# Altium PCB PCB1.PcbDoc (part 2 of 2)
Units mm, origin at the board's own origin, x right, y up, seen from the top; angles counter-clockwise.
Board outline 43.94 x 69.98 mm, 2 copper layers (Top Layer, Bottom Layer); 43 components, 85 nets, 278 pads, 109 vias.
Unrouted connection lines stored in the file: 29.
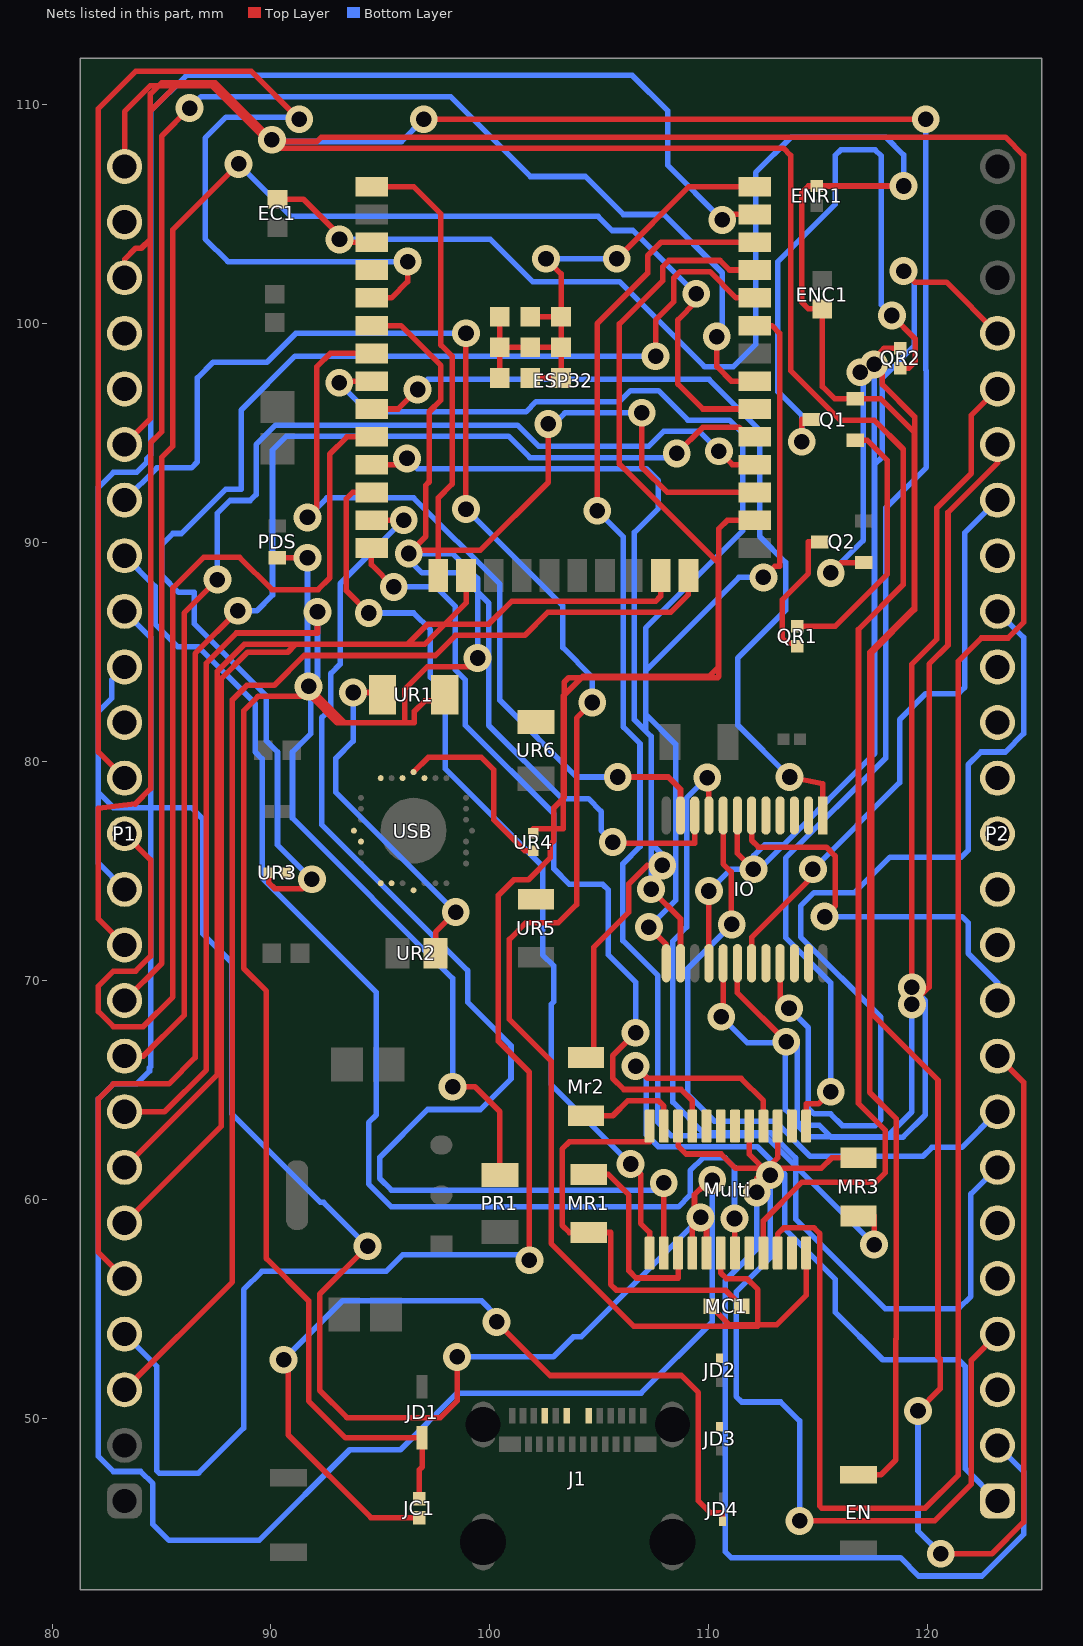
[diagram p2: the nets of this part, all layers, seen from the top]

## Via types
v1: diameter 1.27, hole 0.711, Top Layer to Bottom Layer, 109 vias

## Nets (pads, with @x,y where several pads share a name; then routed paths per layer and width w, separated by ;. In a path a pad name is that pad's centre, name@x,y a point inside that pad or via, vN(x,y) a via of type N, cw(c..) or ccw(c..) an arc to the next point about the centre after c; other vN are vias at no path point) (continued)
NetEC1_2: EC1.2 EN.2 ENC1.1 ENR1.1 ESP32.3 Q1.2 | length 114.1
  Top Layer w0.254: EC1.2@90.297,105.694 91.483,105.694 v1@93.447,103.73 ; v1(93.131,103.861) v1@93.447,103.73 ; ESP32.3@94.601,103.73 v1@93.447,103.73 ; EN.2@116.84,47.42 117.856,47.42 118.542,48.106 118.542,53.619 118.567,53.645 118.567,63.678 117.348,64.897 117.348,84.995 119.393,87.04 119.393,95.037 117.849,96.581 Q1.2@116.701,96.581 115.745,96.581 115.189,97.137 ENC1.1@115.189,100.681 114.554,100.681 114.249,100.986 114.249,105.994 114.554,106.299 ENR1.1@114.935,106.299 v1(118.897,106.299)
  Bottom Layer w0.254: v1(93.131,103.861) 100.025,103.861 101.956,101.93 105.918,101.93 109.804,98.044 111.125,98.044 112.141,99.06 112.141,106.909 113.767,108.534 118.085,108.534 118.897,107.721 v1(118.897,106.299)
NetESP32_1: ESP32.1 ESP32.15 | length 20.7
  Top Layer w0.254: ESP32.1@94.601,106.27 96.52,106.27 97.765,105.025 97.765,99.035 98.273,98.527 98.273,92.685 97.641,92.053 ESP32.15@97.641,88.51
NetESP32_4: ESP32.4 P1.15
NetESP32_5: ESP32.5 P1.14 | length 63.7
  Top Layer w0.254: P1.14@83.312,79.248 82.118,80.442 82.118,109.83 83.832,111.543 89.092,111.543 v1(91.288,109.347) ; ESP32.5@94.601,101.19 95.504,101.19 96.241,101.927 v1(96.241,102.845)
  Bottom Layer w0.254: v1(91.288,109.347) 91.193,109.442 87.949,109.442 86.995,108.488 86.995,103.886 88.036,102.845 v1(96.241,102.845)
NetESP32_6: ESP32.6 IO.10 | length 36.9
  Top Layer w0.254: ESP32.6@94.601,99.92 95.939,99.92 97.765,98.095 97.765,96.52 97.231,95.987 97.231,92.786 97.079,92.634 97.079,90.297 v1(96.291,89.51) ; v1(105.613,76.327) 105.613,76.276 109.358,76.276 IO.10@109.358,77.543
  Bottom Layer w0.254: v1(96.291,89.51) 96.291,89.23 96.901,88.621 98.577,88.621 99.949,87.249 99.949,81.661 103.302,78.308 104.496,78.308 105.08,77.724 105.08,76.86 v1(105.613,76.327)
NetESP32_7: ESP32.7 IO.11 | length 37
  Top Layer w0.254: v1(91.669,91.161) 92.1,91.592 92.1,98.044 92.706,98.65 ESP32.7@94.601,98.65 ; v1(105.842,79.299) 108.149,79.299 108.708,78.74 IO.11@108.708,77.543
  Bottom Layer w0.254: v1(91.669,91.161) 92.558,92.05 96.52,92.05 100.457,88.113 100.457,82.804 103.962,79.299 v1(105.842,79.299)
NetESP32_8: ESP32.8 IO.13 | length 49.2
  Top Layer w0.254: v1(93.116,97.307) 93.189,97.38 ESP32.8@94.601,97.38 ; v1(107.264,72.441) 108.058,71.647 IO.13@108.058,70.793
  Bottom Layer w0.254: v1(93.116,97.307) 94.441,95.983 101.651,95.983 102.112,96.444 105.918,96.444 106.427,96.953 107.696,96.953 109.043,95.606 110.947,95.606 111.557,94.996 111.557,90.551 107.112,86.106 107.112,82.169 108.483,80.797 108.483,73.66 v1(107.264,72.441)
NetESP32_9: ESP32.9 IO.1 | length 40.5
  Top Layer w0.254: ESP32.9@94.601,96.11 95.805,96.11 v1(96.698,97.003) ; v1(113.69,79.299) 115.208,78.994 IO.1@115.208,77.543
  Bottom Layer w0.254: v1(96.698,97.003) 97.156,97.461 110.019,97.461 112.319,95.161 112.319,90.297 113.513,89.103 113.513,86.919 111.323,84.729 111.323,81.666 v1(113.69,79.299)
NetESP32_10: ESP32.10 P1.13 | length 49.6
  Top Layer w0.254: P1.13@83.312,76.708 84.506,75.514 84.506,71.12 83.82,70.434 82.804,70.434 82.118,69.748 82.118,68.58 82.804,67.894 84.166,67.894 85.522,69.25 85.522,87.935 86.919,89.332 88.57,89.332 90.043,87.859 92.151,87.859 92.685,88.392 92.685,94.056 93.468,94.84 ESP32.10@94.601,94.84
NetESP32_11: ESP32.11 IO.14 | length 37
  Top Layer w0.254: ESP32.11@94.601,93.57 95.932,93.57 v1(96.215,93.853) ; v1(107.366,74.168) 108.708,72.826 IO.14@108.708,70.793
  Bottom Layer w0.254: v1(96.215,93.853) 96.684,93.384 107.149,93.384 107.696,92.837 107.696,91.567 106.604,90.475 106.604,81.915 107.366,81.153 v1(107.366,74.168)
NetESP32_12: ESP32.12 Multi.1 | length 42.8
  Top Layer w0.254: v1(94.463,86.792) 93.447,87.808 93.447,92.021 93.726,92.3 ESP32.12@94.601,92.3 ; v1(106.426,61.62) 106.883,61.163 106.883,58.909 107.296,58.496 Multi.1@107.296,57.552
  Bottom Layer w0.254: v1(94.463,86.792) 96.52,86.792 97.283,86.029 97.283,83.862 97.968,83.178 97.968,79.668 102.413,75.223 102.413,71.177 102.921,70.669 102.921,69.037 102.794,68.91 102.794,65.253 v1(106.426,61.62)
NetESP32_13: ESP32.13 Multi.2 | length 57.1
  Top Layer w0.254: ESP32.13@94.601,91.03 96.059,91.03 v1(96.063,91.034) ; Multi.2@107.946,57.552 v1(107.946,60.757)
  Bottom Layer w0.254: v1(96.063,91.034) 93.163,88.134 93.163,84.455 92.735,84.027 92.735,82.423 92.329,82.017 92.329,77.114 98.984,70.46 98.984,69.012 100.965,67.031 100.965,65.507 99.568,64.11 97.155,64.11 94.971,61.925 94.971,60.96 95.504,60.427 107.616,60.427 v1(107.946,60.757)
NetESP32_14: ESP32.14 Multi.21 | length 36.9
  Top Layer w0.254: ESP32.14@94.601,89.76 94.59,89.76 94.59,89.002 v1(95.606,87.986) ; v1(106.655,67.615) 105.613,66.573 105.613,65.532 106.121,65.024 108.738,65.024 109.246,64.516 Multi.21@109.246,63.352
  Bottom Layer w0.254: v1(95.606,87.986) 97.536,87.986 98.425,87.097 98.425,84.194 98.882,83.736 98.882,81.661 102.921,77.622 102.921,75.108 103.632,74.397 105.156,74.397 105.41,74.143 105.41,71.171 106.655,69.926 v1(106.655,67.615)
NetESP32_16: ESP32.16 P1.6 | length 40.6
  Top Layer w0.254: P1.6@83.312,58.928 87.732,63.348 87.732,83.803 88.926,84.998 90.765,84.998 91.126,85.358 97.017,85.358 98.911,87.252 ESP32.16@98.911,88.51
NetESP32_23: ESP32.23 P1.7 | length 47
  Top Layer w0.254: P1.7@83.312,61.468 87.554,65.71 87.554,84.132 88.785,85.363 96.246,85.363 97.16,86.276 99.942,86.276 100.991,87.325 107.569,87.325 107.801,87.557 ESP32.23@107.801,88.51
NetESP32_24: ESP32.24 P1.3 | length 57.3
  Top Layer w0.254: P1.3@83.312,51.308 88.24,56.236 88.24,82.829 88.9,83.49 90.156,83.49 91.516,84.85 97.507,84.85 98.425,85.768 101.593,85.768 102.641,86.817 108.258,86.817 109.071,87.63 ESP32.24@109.071,88.51
NetESP32_26: ESP32.26 P1.4 | length 76.2
  Top Layer w0.254: v1(101.803,57.226) 101.803,65.811 100.381,67.234 100.381,73.889 101.092,74.6 101.752,74.6 102.765,75.612 102.765,76.229 102.916,76.381 102.916,77.893 103.391,78.367 103.391,83.629 103.594,83.833 110.401,83.833 110.465,83.896 110.465,90.649 110.846,91.03 ESP32.26@112.101,91.03
  Bottom Layer w0.254: P1.4@83.312,53.848 84.785,52.375 84.785,47.6 84.887,47.498 86.69,47.498 88.748,49.555 88.748,55.88 89.586,56.718 95.261,56.718 96.012,57.469 101.56,57.469 v1(101.803,57.226)
NetESP32_27: ESP32.27 P1.8 | length 74.1
  Top Layer w0.254: P1.8@83.312,64.008 85.134,64.008 87.046,65.92 87.046,84.506 88.417,85.877 92.126,85.877 v1(92.126,86.843) ; v1(91.719,83.439) 93.385,81.774 96.114,81.774 96.114,83.312 97.144,84.342 99.049,84.342 v1(99.441,84.734) ; v1(96.291,89.51) 96.444,89.662 99.568,89.662 102.667,92.761 v1(102.667,95.428) ; v1(106.934,95.936) 106.934,93.472 108.106,92.3 ESP32.27@112.101,92.3
  Bottom Layer w0.254: v1(91.719,83.439) 92.126,83.845 v1(92.126,86.843) ; v1(96.291,89.51) 98.298,89.51 99.441,88.367 v1(99.441,84.734) ; v1(102.667,95.428) 102.923,95.428 103.431,95.936 v1(106.934,95.936)
NetESP32_28: ESP32.28 P1.9 | length 55.9
  Top Layer w0.254: P1.9@83.312,66.548 84.166,66.548 86.03,68.412 86.03,86.792 v1(87.554,88.316) ; v1(110.465,94.183) 111.078,93.57 ESP32.28@112.101,93.57
  Bottom Layer w0.254: v1(87.554,88.316) 87.554,91.351 88.135,91.932 89.05,91.932 89.32,92.202 89.32,94.488 90.209,95.377 101.262,95.377 102.239,94.4 107.252,94.4 107.95,95.098 109.55,95.098 v1(110.465,94.183)
NetESP32_29: ESP32.29 P1.5 | length 67.1
  Top Layer w0.254: P1.5@83.312,56.388 82.118,57.582 82.118,64.592 82.804,65.278 85.335,65.278 86.538,66.48 86.538,84.941 v1(88.49,86.893) ; v1(108.534,94.082) 109.728,95.275 111.375,95.275 111.811,94.84 ESP32.29@112.101,94.84
  Bottom Layer w0.254: v1(88.49,86.893) 89.357,86.893 90.068,87.605 90.068,94.234 90.703,94.869 100.85,94.869 101.828,93.892 108.344,93.892 v1(108.534,94.082)
NetESP32_30: ESP32.30 P1.10 | length 72.2
  Top Layer w0.254: P1.10@83.312,69.088 85.014,70.79 85.014,93.91 85.509,94.405 85.509,104.295 v1(88.519,107.305) ; v1(109.423,101.371) 109.423,101.016 108.585,100.178 108.585,97.253 109.728,96.11 ESP32.30@112.101,96.11
  Bottom Layer w0.254: v1(88.519,107.305) 90.916,104.909 104.944,104.909 105.588,104.265 106.53,104.265 v1(109.423,101.371)
NetESP32_31: ESP32.31 P1.11 | length 75.5
  Top Layer w0.254: P1.11@83.312,71.628 82.118,72.822 82.118,77.876 83.801,78.067 84.506,78.772 84.506,94.57 85.001,95.066 85.001,108.572 v1(86.284,109.855) ; v1(110.367,99.419) 110.367,98.044 111.031,97.38 ESP32.31@112.101,97.38
  Bottom Layer w0.254: v1(86.284,109.855) 86.808,110.38 98.205,110.38 101.854,106.731 104.36,106.731 106.096,104.995 107.959,104.995 110.617,102.337 110.617,99.67 v1(110.367,99.419)
NetESP32_33: ESP32.33 Mr2.1 | length 40.1
  Top Layer w0.254: Mr2.1@104.394,66.477 104.75,66.477 104.75,71.526 106.35,73.127 106.35,74.422 107.188,75.26 v1(107.874,75.26) ; ESP32.33@112.101,99.92 112.881,99.92 113.233,99.568 113.233,88.925 113.005,88.925 v1(112.497,88.417)
  Bottom Layer w0.254: v1(107.874,75.26) 107.874,75.768 107.366,76.276 107.366,81.153 107.112,81.407 107.112,84.15 111.379,88.417 v1(112.497,88.417)
NetESP32_34: ESP32.34 UR3.2 | length 57.8
  Top Layer w0.254: UR3.2@89.895,74.93 89.895,74.473 90.174,74.193 91.44,74.193 v1(91.872,74.625) ; v1(107.569,98.523) 107.569,100.178 108.407,101.016 108.407,102.108 108.687,102.387 110.055,102.387 111.252,101.19 ESP32.34@112.101,101.19
  Bottom Layer w0.254: v1(91.872,74.625) 90.297,76.2 90.297,80.442 89.789,80.95 89.789,83.007 86.487,86.309 86.487,87.732 85.776,87.732 85.014,88.494 85.014,89.916 85.522,90.424 85.909,90.424 87.924,92.44 88.643,92.44 88.643,96.062 91.104,98.523 v1(107.569,98.523)
NetESP32_35: ESP32.35 UR4.2 | length 40.8
  Top Layer w0.254: UR4.2@101.981,76.729 101.981,76.941 103.353,76.941 103.353,83.007 104.242,83.896 110.007,83.896 110.439,84.328 110.439,89.078 105.918,93.599 105.918,99.996 107.899,101.977 107.899,102.616 108.179,102.895 110.512,102.895 110.947,102.46 ESP32.35@112.101,102.46
NetESP32_36: ESP32.36 MR3.1 | length 61.7
  Top Layer w0.254: v1(104.902,91.465) 104.902,100.006 107.213,102.317 107.213,103.124 107.819,103.73 ESP32.36@112.101,103.73 ; MR3.1@116.84,59.253 117.551,59.253 v1(117.551,57.937)
  Bottom Layer w0.254: v1(104.902,91.465) 106.096,90.272 106.096,81.585 106.858,80.823 106.858,76.119 106.074,75.335 106.074,71.828 107.671,70.231 107.671,63.525 108.28,62.916 112.573,62.916 v1(117.551,57.937)
NetESP32_37: ESP32.37 P1.12 | length 70.2
  Top Layer w0.254: v1(110.617,104.75) 110.867,105 ESP32.37@112.101,105
  Bottom Layer w0.254: P1.12@83.312,74.168 82.118,75.362 82.118,92.532 82.804,93.218 83.864,93.218 84.336,93.69 84.336,93.842 84.506,94.012 84.506,109.728 86.131,111.354 106.502,111.354 108.128,109.728 108.128,107.239 v1(110.617,104.75)
NetESP32_38: ESP32.38 ESP32.39 | length 25
  Top Layer w0.254: ESP32.39@100.451,97.53 ESP32.39@100.451,98.93 ; ESP32.39@100.451,100.33 ESP32.39@100.451,98.93 ; ESP32.39@101.851,97.53 ESP32.39@103.251,97.53 ESP32.39@103.251,98.93 ; ESP32.39@101.851,100.33 ESP32.39@103.251,100.33 ; v1(102.565,102.972) 103.251,102.286 ESP32.39@103.251,100.33 ; v1(105.795,102.972) 109.093,106.27 ESP32.38@112.101,106.27 ; ESP32.39@100.451,98.93 ESP32.39@101.851,98.93 ESP32.39@103.251,98.93 ; ESP32.39@103.251,98.93 ESP32.39@103.251,100.33
  Bottom Layer w0.254: v1(102.565,102.972) v1(105.795,102.972)
NetIO_2: IO.2 P2.14
NetIO_3: IO.3 P2.13
NetIO_4: IO.4 P2.12
NetIO_5: IO.5 P2.11
NetIO_6: IO.6 P2.10 | length 19
  Top Layer w0.254: IO.6@111.958,77.543 111.958,76.408 112.268,76.098 115.367,76.098 115.773,75.692 115.773,73.406 v1(115.291,72.923)
  Bottom Layer w0.254: v1(115.291,72.923) 121.564,72.923 121.844,72.644 121.844,71.247 123.19,69.901 P2.10@123.19,69.088
NetIO_7: IO.7 P2.9 | length 112.8
  Top Layer w0.254: IO.7@111.308,77.543 111.308,75.814 v1(112.039,75.082) ; v1(117.551,98.146) 117.932,97.765 117.932,97.231 119.405,95.758 119.405,86.944 117.45,84.988 117.45,68.478 120.472,65.456 120.472,52.807 120.574,52.705 120.574,51.359 v1(119.558,50.343) ; v1(120.599,43.815) 122.936,43.815 124.384,45.263 124.384,65.354 P2.9@123.19,66.548
  Bottom Layer w0.254: v1(112.039,75.082) 112.039,75.692 112.547,76.2 113.404,76.2 117.551,80.347 v1(117.551,98.146) ; v1(119.558,50.343) 119.558,44.856 v1(120.599,43.815)
NetIO_8: IO.8 P2.8 | length 29.9
  Top Layer w0.254: IO.8@110.658,77.543 110.658,75.329 111.023,74.963 111.023,72.593 v1(111.049,72.568)
  Bottom Layer w0.254: v1(111.049,72.568) 109.042,70.561 109.042,64.795 110.256,63.582 113.017,63.582 114.623,61.976 119.786,61.976 120.193,62.382 121.564,62.382 P2.8@123.19,64.008
NetIO_9: IO.9 P2.7 | length 43
  Top Layer w0.254: v1(109.931,79.273) 110.008,79.197 IO.9@110.008,77.543
  Bottom Layer w0.254: v1(109.931,79.273) 108.991,78.334 108.991,72.441 108.356,71.806 108.356,64.444 109.758,63.043 112.821,63.043 113.97,61.894 113.97,59.106 118.059,55.016 121.412,55.016 121.971,55.575 121.971,60.249 P2.7@123.19,61.468
NetIO_16: IO.16 P2.22 | length 41.9
  Top Layer w0.254: IO.16@110.008,70.793 v1(110.007,74.092) ; v1(118.897,102.413) 119.405,101.905 120.853,101.905 P2.22@123.19,99.568
  Bottom Layer w0.254: v1(110.007,74.092) 110.998,75.082 112.286,75.082 117.577,80.373 117.577,93.574 117.932,93.929 117.932,97.536 119.38,98.984 119.38,101.93 v1(118.897,102.413)
NetIO_17: IO.17 P2.21 | length 51.1
  Top Layer w0.254: v1(110.566,68.351) 110.658,68.443 IO.17@110.658,70.793 ; v1(119.278,69.698) 119.278,84.455 120.421,85.598 120.421,91.6 121.996,93.174 121.996,95.834 P2.21@123.19,97.028
  Bottom Layer w0.254: v1(110.566,68.351) 111.766,67.151 113.153,67.151 113.502,66.802 113.502,64.108 114.225,63.385 115.053,63.385 115.59,62.848 118.872,62.848 119.888,63.864 119.888,69.088 v1(119.278,69.698)
NetIO_18: IO.18 P2.20 | length 46.9
  Top Layer w0.254: IO.18@111.308,70.793 111.308,69.438 v1(113.538,67.208) ; v1(119.278,68.91) 120.066,69.698 120.066,84.455 120.929,85.319 120.929,91.389 123.19,93.65 P2.20@123.19,94.488
  Bottom Layer w0.254: v1(113.538,67.208) 114.046,67.208 114.046,63.373 114.554,62.865 118.135,62.865 119.278,64.008 v1(119.278,68.91)
NetIO_19: IO.19 P2.19 | length 26.7
  Top Layer w0.254: IO.19@111.958,70.793 111.958,71.973 114.757,74.772 v1(114.757,75.082)
  Bottom Layer w0.254: v1(114.757,75.082) 118.72,79.045 118.72,81.915 119.913,83.109 121.412,83.109 121.691,83.388 121.691,90.449 P2.19@123.19,91.948
NetIO_20: IO.20 P2.18
NetIO_21: IO.21 P2.17 | length 44
  Top Layer w0.254: IO.21@113.258,70.793 113.258,69.139 v1(113.665,68.732)
  Bottom Layer w0.254: v1(113.665,68.732) 114.554,67.843 114.554,64.16 114.808,63.906 115.565,63.906 116.098,63.373 117.602,63.373 117.865,63.636 117.865,68.325 114.194,71.995 114.194,73.401 114.808,74.016 116.662,74.016 118.288,75.641 121.539,75.641 121.844,75.946 121.844,79.858 122.428,80.442 123.546,80.442 124.384,81.28 124.384,85.674 P2.17@123.19,86.868
NetIO_22: IO.22 P2.16
NetIO_23: IO.23 P2.15
NetJ1_A4: J1.A4 JC1.1 JD1.2 UR1.1 | length 52.4
  Top Layer w0.254: JC1.1@96.774,46.323 96.774,47.65 96.901,47.777 JD1.2@96.901,49.111 93.408,49.111 91.719,50.8 91.719,55.372 89.789,57.302 89.789,69.52 88.748,70.561 88.748,82.321 89.408,82.982 91.821,82.982 93.029,81.774 96.545,81.774 96.545,82.296 97.028,82.779 97.946,82.779 UR1.1@97.946,83.058
NetJ1_A6: J1.A6 JD2.2 USB.4
NetJ1_A7: J1.A7 JD3.2 USB.5
NetJC1_2: JC1.2 JD4.2 | length 39.7
  Top Layer w0.254: v1(90.576,52.68) 90.78,52.476 90.78,49.251 94.564,45.466 JC1.2@96.774,45.466 ; v1(100.305,54.407) 102.753,51.958 108.747,51.958 109.525,51.181 109.525,46.228 110.058,45.695 110.617,45.695 JD4.2@110.617,45.297
  Bottom Layer w0.254: v1(90.576,52.68) 93.269,55.372 99.619,55.372 100.305,54.686 v1(100.305,54.407)
NetMC1_1: MC1.1 Multi.12 | length 7.2
  Top Layer w0.254: MC1.1@110.109,55.118 110.956,54.271 113.098,54.271 114.446,55.62 Multi.12@114.446,57.552
NetMC1_2: MC1.2 MR1.1 Multi.24 | length 19.5
  Top Layer w0.254: Multi.24@107.296,63.352 107.296,62.636 103.632,62.636 103.302,62.306 103.302,58.821 103.632,58.491 MR1.1@104.521,58.491 105.512,58.491 105.512,56.122 105.779,55.855 110.772,55.855 MC1.2@111.509,55.118
NetMR1_2: MR1.2 Multi.3 | length 9.2
  Top Layer w0.254: MR1.2@104.521,61.143 105.41,61.143 106.35,60.203 106.35,56.744 106.68,56.413 108.596,56.413 Multi.3@108.596,57.552
NetMr2_2: Mr2.2 Multi.23 | length 4.9
  Top Layer w0.254: Mr2.2@104.394,63.825 105.613,63.825 106.304,64.516 107.692,64.516 107.946,64.262 Multi.23@107.946,63.352
NetMR3_2: MR3.2 Multi.22 | length 9.8
  Top Layer w0.254: Multi.22@108.596,63.352 108.596,62.448 108.966,62.078 110.566,62.078 111.227,61.417 115.133,61.417 115.621,61.905 MR3.2@116.84,61.905
NetMulti_4: Multi.4 P1.17 | length 85.8
  Top Layer w0.254: Multi.4@109.246,57.552 109.246,58.979 109.347,59.08 109.347,60.223 109.728,60.604 109.88,60.604 v1(110.16,60.884)
  Bottom Layer w0.254: P1.17@83.312,86.868 84.506,85.674 84.506,66.072 84.452,66.017 84.452,65.866 83.864,65.278 82.804,65.278 82.118,64.592 82.118,48.26 82.804,47.574 84.049,47.574 84.607,47.015 84.607,45.161 85.344,44.425 89.459,44.425 93.599,48.565 95.91,48.565 98.501,51.156 106.909,51.156 110.16,54.407 v1(110.16,60.884)
NetMulti_5: Multi.5 P1.16 | length 66.3
  Top Layer w0.254: v1(94.412,57.861) 92.227,55.677 92.227,51.283 93.472,50.038 97.739,50.038 98.501,50.8 v1(98.501,52.807) ; v1(109.626,59.182) 109.896,58.912 Multi.5@109.896,57.552
  Bottom Layer w0.254: P1.16@83.312,84.328 82.728,83.744 82.728,82.906 82.118,82.296 82.118,78.588 82.804,77.902 86.36,77.902 86.893,77.368 86.893,72.136 88.214,70.815 88.214,63.906 92.253,59.868 92.405,59.868 v1(94.412,57.861) ; v1(98.501,52.807) 102.895,52.807 103.81,53.721 104.165,53.721 v1(109.626,59.182)
NetMulti_6: Multi.6 P1.19 | length 83.8
  Top Layer w0.254: v1(98.908,91.537) v1(98.908,99.568) ; v1(104.673,82.702) 103.962,81.991 103.962,73.473 103.133,72.644 101.651,72.644 100.889,71.882 100.889,68.224 102.794,66.319 102.794,57.988 106.578,54.204 112.243,54.204 112.243,55.88 111.735,56.388 110.8,56.388 110.546,56.642 Multi.6@110.546,57.552
  Bottom Layer w0.254: P1.19@83.312,91.948 84.785,93.421 86.36,93.421 86.639,93.701 86.639,97.536 87.351,98.247 89.812,98.247 91.133,99.568 v1(98.908,99.568) ; v1(98.908,91.537) 103.331,87.114 103.331,85.213 104.673,83.871 v1(104.673,82.702)
NetMulti_7: Multi.7 P1.18 | length 57
  Top Layer w0.254: v1(111.176,59.131) 111.196,59.111 Multi.7@111.196,57.552
  Bottom Layer w0.254: P1.18@83.312,89.408 84.709,88.011 84.709,86.284 85.75,85.242 86.69,85.242 89.281,82.652 89.281,80.442 89.593,80.129 89.593,74.685 94.818,69.46 94.818,63.871 94.463,63.515 94.463,60.706 95.504,59.665 108.61,59.665 109.144,60.198 109.144,61.316 109.728,61.9 110.744,61.9 111.176,61.468 v1(111.176,59.131)
NetMulti_8: Multi.8 P1.21
NetMulti_9: Multi.9 P1.20 | length 105.6
  Top Layer w0.254: P1.20@83.312,94.488 84.493,95.669 84.493,109.728 85.636,110.871 87.3,110.871 90.145,108.026 113.411,108.026 113.741,107.696 113.741,97.866 116.002,95.606 117.551,95.606 118.885,94.272 118.885,88.087 116.84,86.042 116.84,64.389 118.059,63.17 118.059,61.214 117.622,60.777 114.244,60.777 112.496,59.029 Multi.9@112.496,57.552
NetMulti_10: Multi.10 P1.23 | length 135.4
  Top Layer w0.254: P1.23@83.312,102.108 83.312,102.946 83.82,103.454 84.074,103.454 84.493,103.873 84.493,110.503 85.014,111.023 87.452,111.023 90.145,108.331 92.1,108.331 92.304,108.534 123.546,108.534 124.384,107.696 124.384,86.36 123.673,85.649 122.453,85.649 121.387,84.582 121.387,47.396 119.888,45.898 115.164,45.898 115.062,45.999 115.062,58.445 114.808,58.699 113.425,58.699 113.146,58.42 Multi.10@113.146,57.552
NetMulti_11: Multi.11 P1.22
NetMulti_13: Multi.13 P1.25 | length 91.4
  Top Layer w0.254: P1.25@83.312,107.188 83.312,109.703 84.48,110.871 87.579,110.871 v1(90.043,108.407) ; v1(96.977,109.347) v1(119.913,109.347) ; Multi.13@114.446,63.352 114.446,64.364 115.011,64.364 v1(115.57,64.922)
  Bottom Layer w0.254: v1(90.043,108.407) 90.043,108.331 95.961,108.331 v1(96.977,109.347) ; v1(115.57,64.922) 115.57,69.901 113.513,71.958 113.513,75.59 118.085,80.162 118.085,91.592 119.939,93.447 119.939,97.866 119.913,97.892 v1(119.913,109.347)
NetMulti_14: Multi.14 P1.24
NetMulti_15: Multi.15 P2.2 | length 39.9
  Top Layer w0.254: v1(112.192,60.325) 112.192,60.946 113.146,61.9 Multi.15@113.146,63.352
  Bottom Layer w0.254: v1(112.192,60.325) 112.192,57.734 110.744,56.286 110.744,43.917 111.023,43.637 118.751,43.637 119.589,42.799 122.479,42.799 124.384,44.704 124.384,47.574 P2.2@123.19,48.768
NetMulti_16: Multi.16 P2.1 | length 39
  Top Layer w0.254: v1(106.655,66.091) 107.213,65.532 111.48,65.532 112.496,64.516 Multi.16@112.496,63.352
  Bottom Layer w0.254: v1(106.655,66.091) 107.137,65.608 107.137,62.967 107.696,62.408 112.217,62.408 113.462,61.163 113.462,58.674 115.773,56.363 115.773,54.855 117.948,52.68 121.412,52.68 121.717,52.375 121.717,47.701 P2.1@123.19,46.228
NetMulti_17: Multi.17 P2.4 | length 37.2
  Top Layer w0.254: Multi.17@111.846,63.352 111.846,62.068 v1(112.801,61.112) ; v1(114.148,45.314) 120.315,45.314 121.996,46.995 121.996,52.654 P2.4@123.19,53.848
  Bottom Layer w0.254: v1(112.801,61.112) 112.801,57.328 111.252,55.778 111.252,51.003 111.506,50.749 113.284,50.749 114.148,49.886 v1(114.148,45.314)
NetMulti_18: Multi.18 P2.3
NetMulti_19: Multi.19 P2.6
NetMulti_20: Multi.20 P2.5
NetPDS_1: PDS.1 PR1.1 | length 34.6
  Top Layer w0.254: PDS.1@90.297,89.318 v1(91.669,89.318) ; v1(98.298,65.151) 99.314,65.151 100.457,64.008 PR1.1@100.457,61.117
  Bottom Layer w0.254: v1(91.669,89.318) 91.669,83.541 91.592,83.464 91.821,83.236 91.821,81.28 90.983,80.442 90.983,77.419 98.298,70.104 v1(98.298,65.151)
NetQ1_1: Q1.1 QR1.2 | length 12.1
  Top Layer w0.254: QR1.2@114.046,86.177 115.772,86.177 118.161,88.565 118.161,93.767 117.246,94.681 Q1.1@116.701,94.681
NetQ1_3: Q1.3 QR2.1 USB.24 | length 29.2
  Top Layer w0.254: v1(114.249,94.615) 114.249,95.631 Q1.3@114.681,95.631 ; v1(118.364,100.381) 119.431,99.314 119.431,98.278 119.126,97.973 QR2.1@118.745,97.973
  Bottom Layer w0.254: v1(114.249,94.615) 114.249,95.809 113.157,96.901 113.157,102.845 115.773,105.461 115.773,107.696 116.027,107.95 117.602,107.95 117.881,107.671 117.881,100.863 v1(118.364,100.381)
NetQ2_1: Q2.1 QR2.2 | length 13.8
  Top Layer w0.254: v1(115.57,88.621) 116.042,89.093 Q2.1@117.088,89.093 ; v1(116.916,97.79) 118.003,98.877 QR2.2@118.745,98.877
  Bottom Layer w0.254: v1(115.57,88.621) 117.054,90.105 117.054,97.652 v1(116.916,97.79)
NetQ2_3: Q2.3 QR1.1 USB.28 | length 6.2
  Top Layer w0.254: QR1.1@114.046,85.273 113.36,85.598 113.36,87.405 114.554,88.599 114.554,90.043 Q2.3@115.068,90.043
NetUR1_2: UR1.2 UR2.2 USB.8 | length 16.3
  Top Layer w0.254: v1(93.751,83.16) 95.094,83.16 UR1.2@95.094,83.058 ; UR2.2@97.522,71.247 97.522,72.212 v1(98.436,73.127)
  Bottom Layer w0.254: v1(93.751,83.16) 93.751,80.942 92.964,80.154 92.964,78.599 v1(98.436,73.127)
NetUR3_1: UR3.1 USB.26
NetUR4_1: UR4.1 USB.25 | length 8.9
  Top Layer w0.254: USB.25@96.512,79.523 97.186,80.197 99.609,80.197 100.172,79.635 100.172,77.353 101.6,75.925 UR4.1@101.981,75.925
NetUR5_2: UR5.2 USB.11
NetUR6_2: UR6.2 USB.9
pads on no net: ESP32.17 ESP32.18 ESP32.19 ESP32.20 ESP32.21 ESP32.22 ESP32.32 J1.1 J1.2 J1.3 J1.4 J1.A2 J1.A3 J1.A5 J1.A8 J1.A9 J1.A10 J1.A11 J1.B1 J1.B2 J1.B3 J1.B4 J1.B5 J1.B6 J1.B7 J1.B8 J1.B9 J1.B10 J1.B11 J1.B12 USB.1 USB.2 USB.3 USB.10 USB.12 USB.13 USB.14 USB.15 USB.16 USB.17 USB.18 USB.19 USB.20 USB.21 USB.22 USB.23 USB.27 USB.29

## Other copper
Bottom Layer:
  text "3V3" at 86.218,106.172 h1.25 r90
  text "SC5" at 121.143,105.791 h1.25 r90
  text "GND" at 86.218,103.505 h1.25 r90
  text "SD5" at 121.27,103.378 h1.25 r90
  text "2" at 86.233,101.854 h1.25 r90
  text "SC6" at 121.27,100.965 h1.25 r90
  text "4" at 86.233,99.314 h1.25 r90
  text "SD6" at 121.27,98.552 h1.25 r90
  text "5" at 86.218,96.647 h1.25 r90
  text "SC7" at 121.27,96.012 h1.25 r90
  text "13" at 86.218,93.853 h1.25 r90
  text "SD7" at 121.27,93.472 h1.25 r90
  text "15" at 86.218,91.313 h1.25 r90
  text "IO0" at 121.27,91.059 h1.25 r90
  text "16" at 86.218,88.646 h1.25 r90
  text "IO1" at 121.27,88.392 h1.25 r90
  text "17" at 86.106,86.233 h1.25 r90
  text "IO2" at 121.27,85.852 h1.25 r90
  text "18" at 86.218,83.693 h1.25 r90
  text "IO3" at 121.27,83.566 h1.25 r90
  text "19" at 86.218,81.407 h1.25 r90
  text "IO4" at 121.27,80.899 h1.25 r90
  text "23" at 86.218,78.74 h1.25 r90
  text "IO5" at 121.27,78.359 h1.25 r90
  text "25" at 86.218,76.2 h1.25 r90
  text "IO6" at 121.27,76.073 h1.25 r90
  text "39" at 86.218,73.66 h1.25 r90
  text "IO7" at 121.27,73.533 h1.25 r90
  text "36" at 86.218,71.12 h1.25 r90
  text "IO8" at 121.27,70.866 h1.25 r90
  text "SC0" at 86.218,68.326 h1.25 r90
  text "IO9" at 121.27,68.326 h1.25 r90
  text "SD0" at 86.218,65.659 h1.25 r90
  text "IO10" at 121.27,65.532 h1.25 r90
  text "SC1" at 86.218,63.119 h1.25 r90
  text "IO11" at 121.27,62.865 h1.25 r90
  text "SD1" at 86.345,60.579 h1.25 r90
  text "IO12" at 121.397,59.69 h1.25 r90
  text "SC2" at 86.345,57.912 h1.25 r90
  text "IO13" at 121.397,57.15 h1.25 r90
  text "IO14" at 119.253,55.895 h1.25
  text "SD2" at 86.345,55.372 h1.25 r90
  text "IO15" at 119.126,53.355 h1.25
  text "SC3" at 86.345,52.832 h1.25 r90
  text "SD3" at 86.345,50.419 h1.25 r90
  text "3V3" at 121.27,50.165 h1.25 r90
  text "5V" at 121.016,48.133 h1.25 r90
  text "SC4" at 86.345,47.879 h1.25 r90
  text "SD4" at 86.345,44.958 h1.25 r90
  text "GND" at 121.143,44.704 h1.25 r90

## Silkscreen, mask and mechanical layers (free items; w line width, h text height)
Mechanical 1:
  the board outline again, w0.254

## Text inside footprints (layer, text, board x,y; h text height)
P1: Bottom Layer "20" at 81.612,93.668 h1.02 r90; Bottom Layer "1" at 81.612,46.108 h1.02 r90; Bottom Layer "10" at 81.612,68.458 h1.02 r90; Bottom Layer "25" at 81.612,106.368 h1.02 r90
P2: Bottom Layer "25" at 121.49,106.368 h1.02 r90; Bottom Layer "20" at 121.49,93.668 h1.02 r90; Bottom Layer "1" at 121.49,46.108 h1.02 r90; Bottom Layer "10" at 121.49,68.458 h1.02 r90